# Altium PCB Tachometer-BoardV2.PcbDoc
Units mil, origin at the board's own origin, x right, y up, seen from the top; angles counter-clockwise.
Board outline 3000 x 3540 mil, 2 copper layers (Top Layer, Bottom Layer); 35 components, 29 nets, 152 pads, 22 vias.
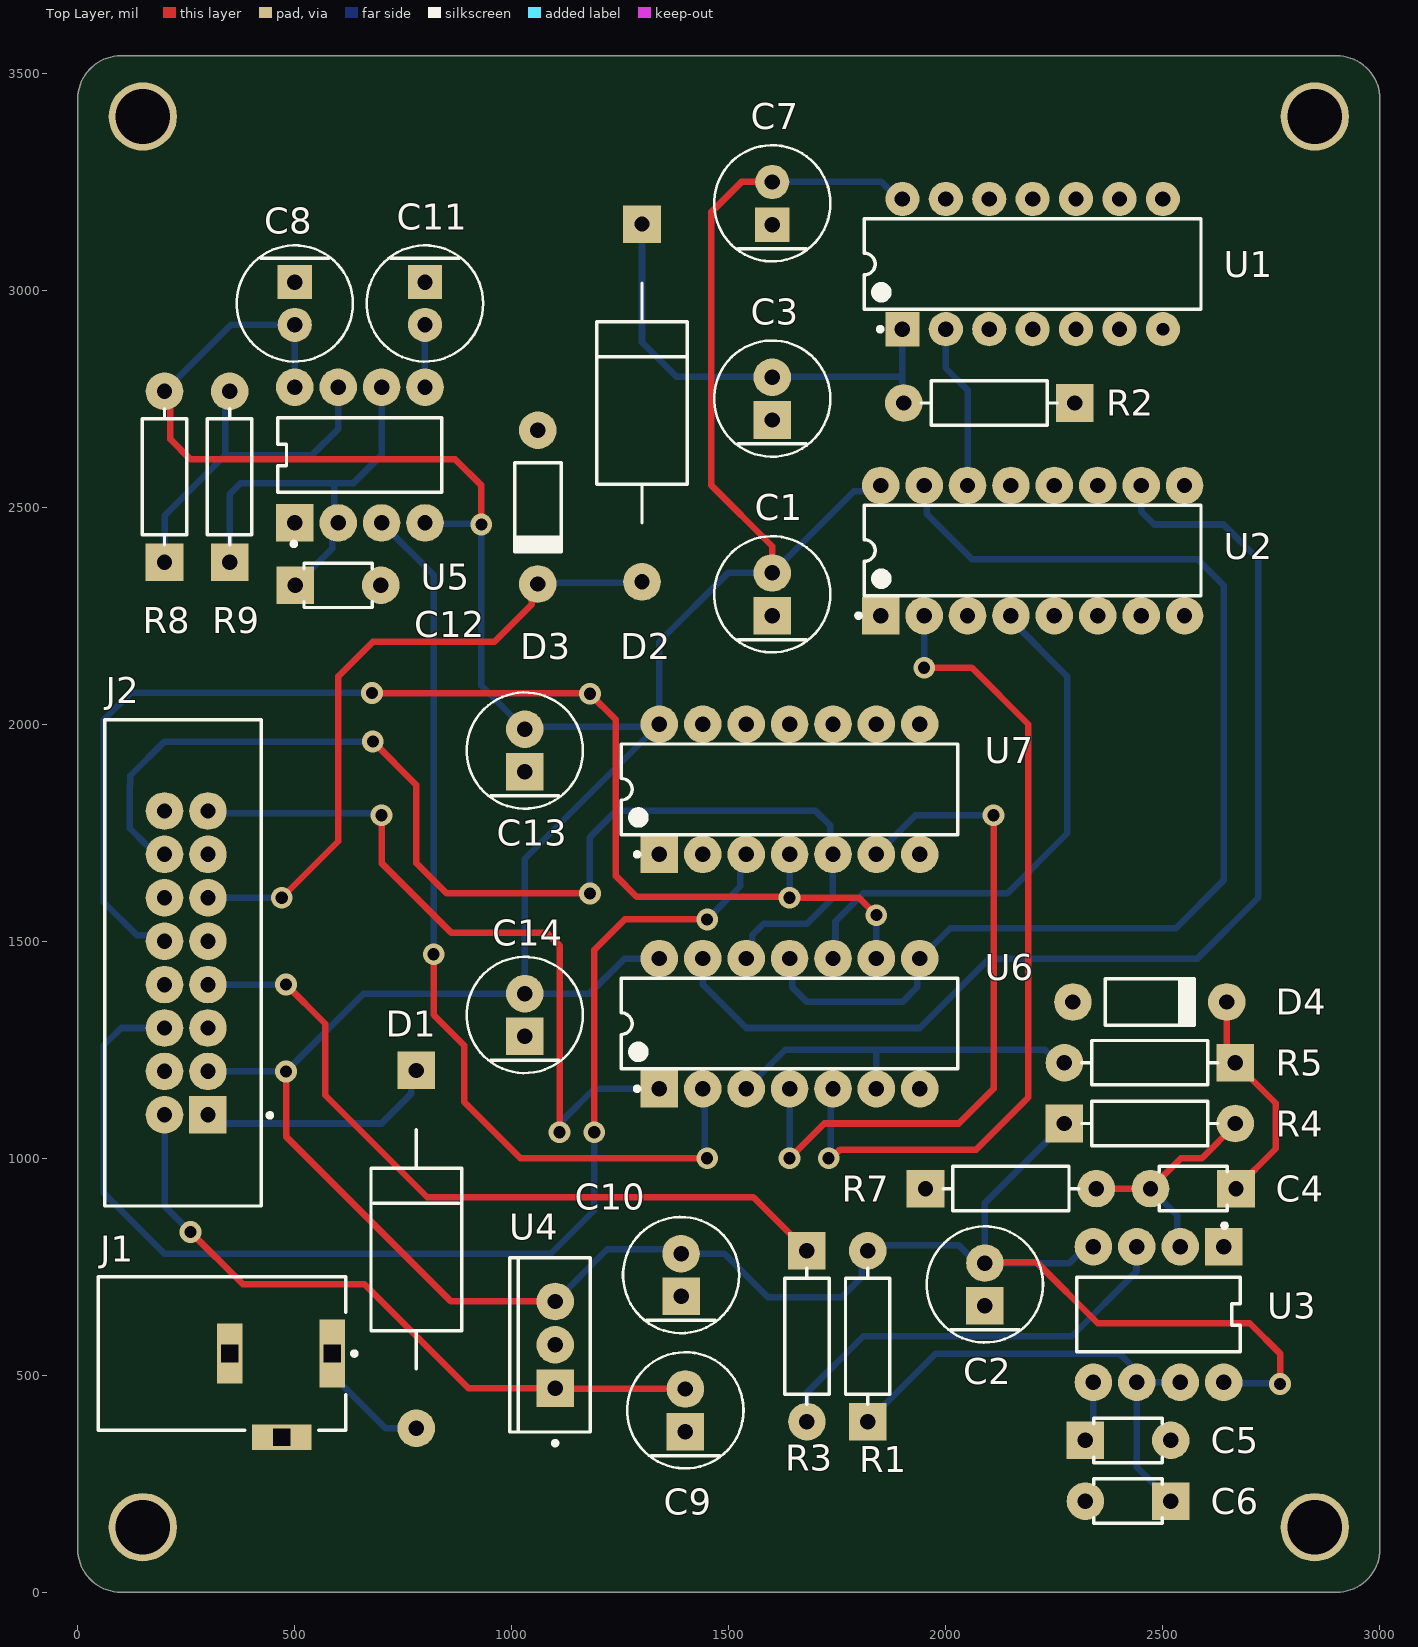
[diagram p0: Top Layer view]
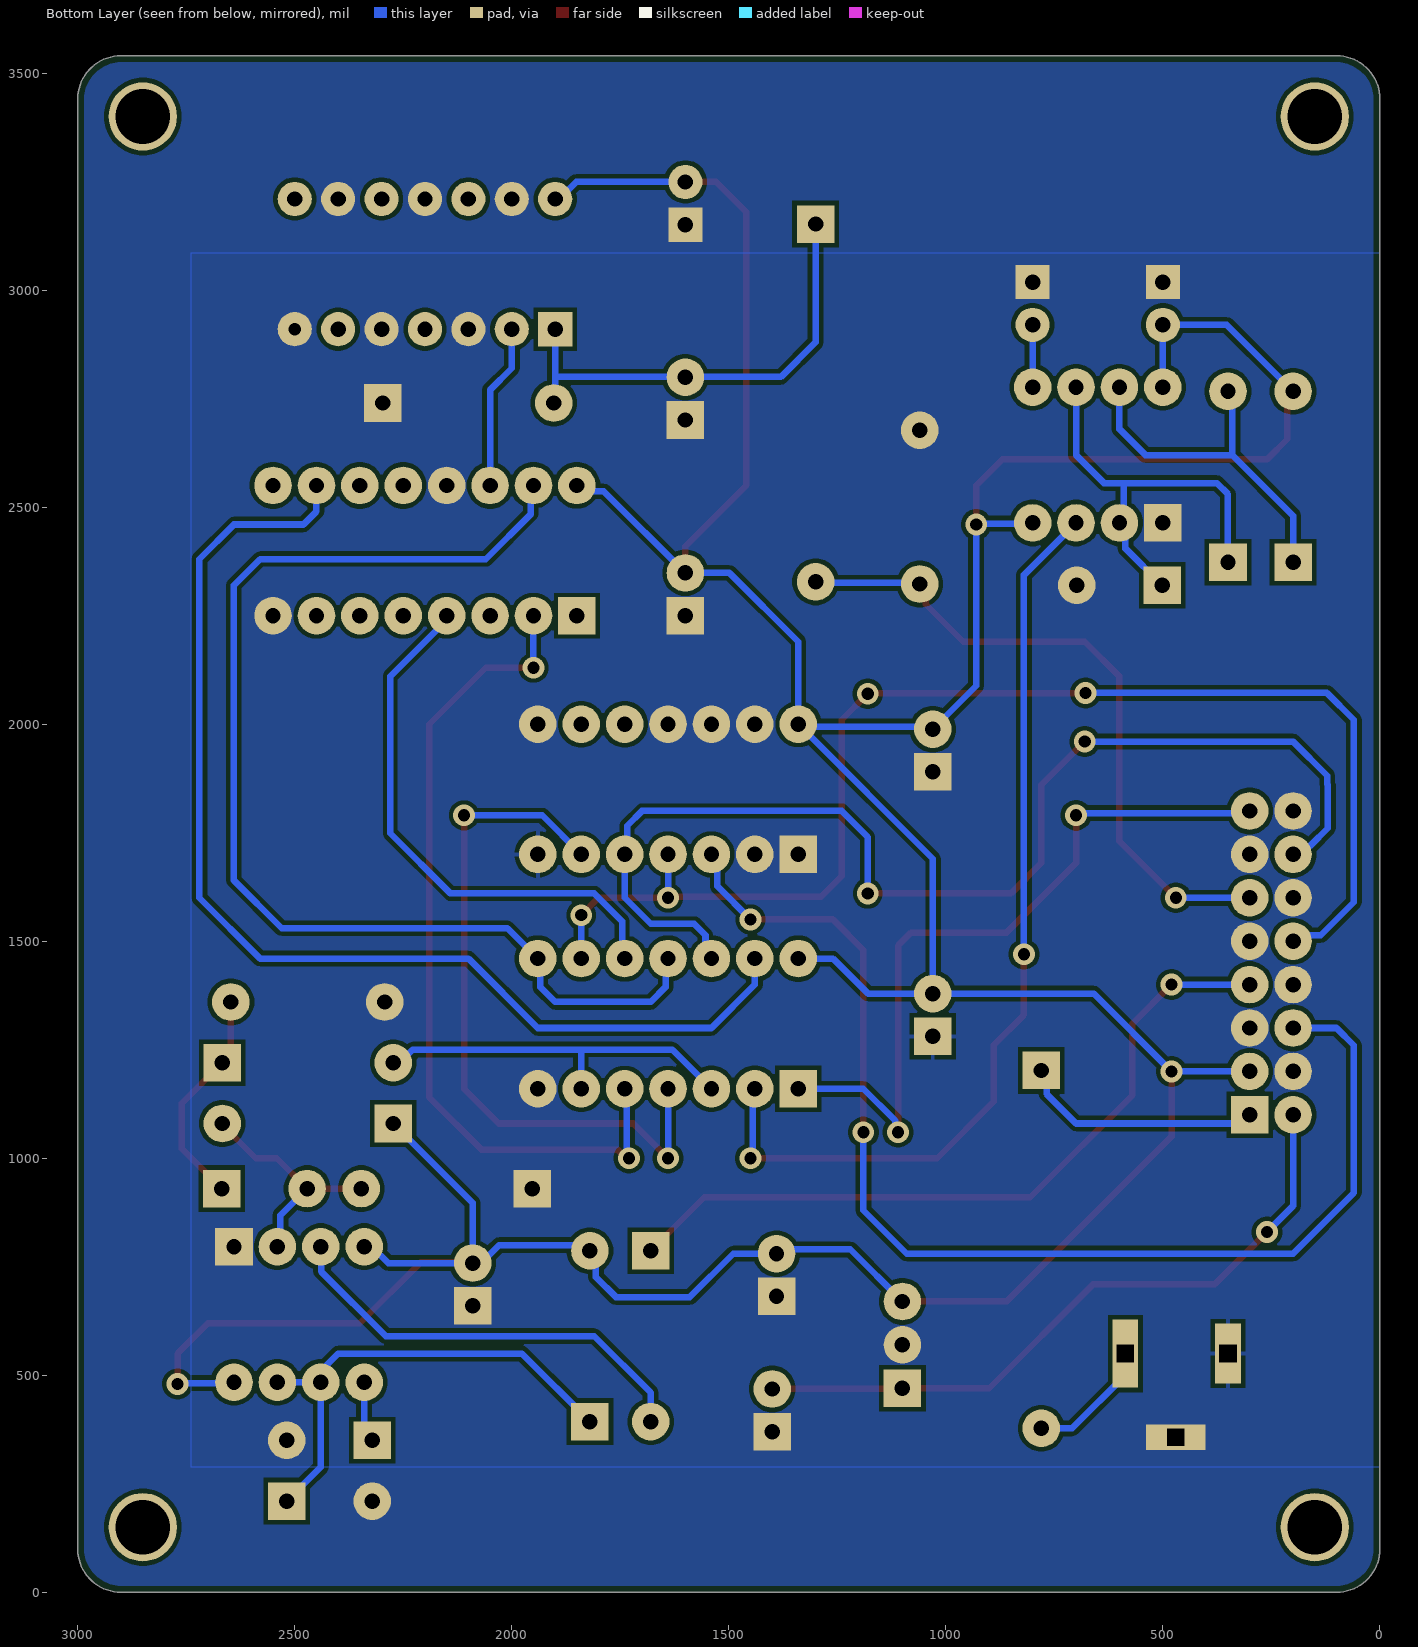
[diagram p1: Bottom Layer view, seen from below]
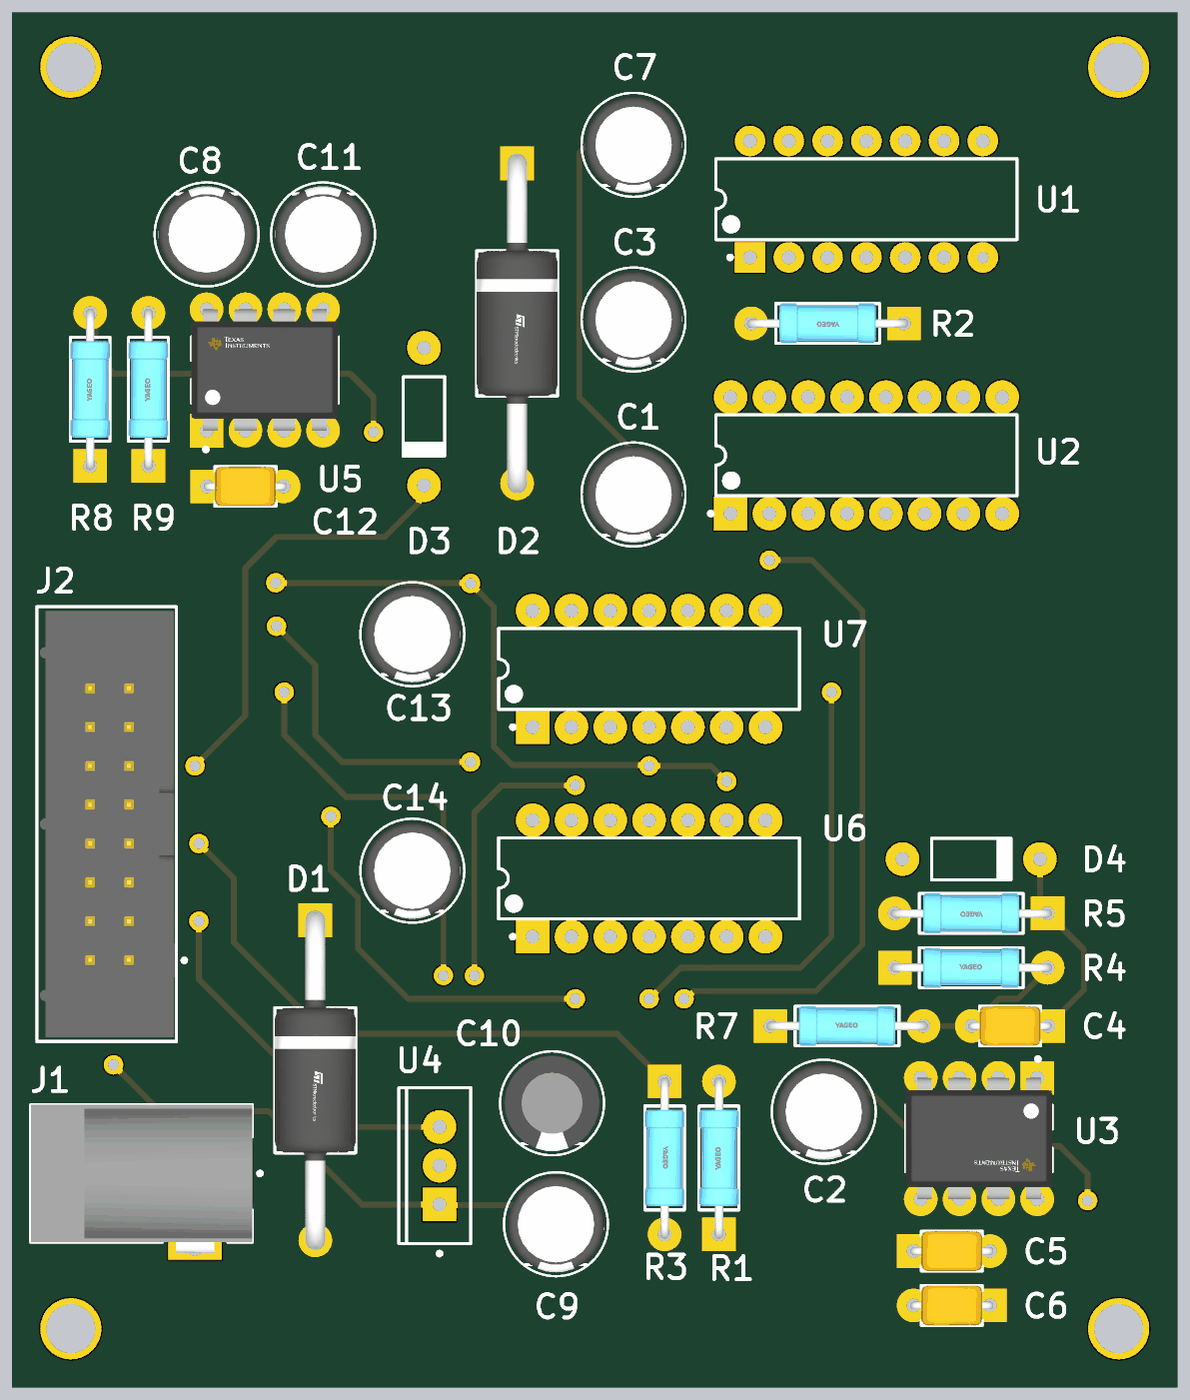
[diagram p2: 3D render of the assembled board from above, using the file's embedded part models]

## Layer stack, top to bottom
Top Solder: solder mask 0.4, Solder Resist, Dk 3.5
Top Layer: signal copper 1.4
Dielectric 1: dielectric 12.6, FR-4, Dk 4.8
Bottom Layer: signal copper 1.4
Bottom Solder: solder mask 0.4, Solder Resist, Dk 3.5

## Board outline
100,0 cw(c100,100) 0,100 0,3440 cw(c100,3440) 100,3540 2900,3540 cw(c2900,3440) 3000,3440 3000,100 cw(c2900,100) 2900,0

## Design rules (kind name [scope] priority, off if disabled: settings)
BoardOutlineClearance [All] p1: gap=15 ignorepadtopadclearanceinfootprint=FALSE
Clearance [All] p1: gap=10 ignorepadtopadclearanceinfootprint=FALSE except(0: Arc-Hole Track-Hole SMDPad-Hole THPad-Hole Via-Hole Fill-Hole Poly-Hole Region-Hole Text-Hole)
PolygonConnect [All] p1: connectstyle=Relief reliefconductorwidth=10 reliefentries=4 polygonreliefangle="90 Angle" airgapwidth=10
RoutingVias [All] p1: holewidth=28 width=50 viastyle="Through Hole" minholewidth=28 minwidth=50 maxholewidth=28 maxwidth=50
SolderMaskExpansion [All] p1: expansion=4 istentingtop=FALSE
Width [All] p1: maxlimit=20 minlimit=12 preferedwidth=15
30 further rules are at their usual default settings.

## Components (designator, comment, footprint, x,y, rotation, side; value= is the part's Value field where it differs from the comment)
C1 "10uF" FP-ESLE3-MFG#1 1600,2299.21 r90 top
C2 "10uF" FP-ESLE3-MFG#1 2090,709.21 r90 top
C3 "0.1uF" FP-ESLE3-MFG#1 1600,2750 r90 top value=10uF
C4 "0.1uF" FP-K15H5-MFG 2570,930 r180 top
C5 "0.1uF" FP-K15H5-MFG 2420,350 r0 top
C6 "0.1uF" FP-K15H5-MFG 2420,210 r180 top
C7 "10uF" FP-ESLE3-MFG#2 1600,3200 r90 top
C8 "10uF" FP-ESLE3-MFG#2 500,2969.21 r270 top
C9 "10uF" FP-ESLE3-MFG#1 1400,419.21 r90 top
C10 "100uF" FP-ZLG6_3X7-MFG 1390,730.79 r90 top
C11 "10uF" FP-ESLE3-MFG#2 800,2969.21 r270 top
C12 "0.1uF" FP-K15H5-MFG 600,2320 r0 top
C13 "10uF" FP-ESLE3-MFG#1 1030,1939.21 r90 top
C14 "10uF" FP-ESLE3-MFG#1 1030,1330 r90 top
D1 "1N4148" FP-DO-201AD-MFG 780,790 r270 top
D2 "1N4148" FP-DO-201AD-MFG 1300,2740 r270 top
D3 "1N4731A" FAIR-DO-41-2_V 1060,2500 r270 top
D4 "1N4731A" FAIR-DO-41-2_V 2470,1360 r0 top
J1 "NEB 21 R" LUMB-NEB21R_V 332.28,550 r270 top
J2 "30316-6002HB" FP-30316-6002HB-MFG 242.5,1450 r90 top
R1 "47K" FP-MFR-25-MFG 1820,590 r90 top value=1.18kΩ
R2 "10K" FP-MFR-25-MFG 2100,2740 r180 top value=1.18kΩ
R3 "100K" FP-MFR-25-MFG 1680,590 r270 top value=1.18kΩ
R4 "1K" FP-MFR-25-MFG 2470,1080 r0 top value=1.18kΩ
R5 "1K" FP-MFR-25-MFG 2470,1220 r180 top value=1.18kΩ
R7 "4.7K" FP-MFR-25-MFG 2150,930 r0 top value=1.18kΩ
R8 "120K" FP-MFR-25-MFG 200,2570 r90 top value=1.18kΩ
R9 "180K" FP-MFR-25-MFG 350,2570 r90 top value=1.18kΩ
U1 "SN7414N" N0014A#1 2200,3060 r90 top
U2 "CD4017BE" N0016A 2200,2400 r90 top
U3 "LM555CN/NOPB" FP-P0008A-MFG 2490,640 r270 top
U4 "LM7805CT" FAIR-TO-220-3 1100,570 r180 top
U5 "LM555CN/NOPB" FP-P0008A-MFG 650,2620 r90 top
U6 "SN74HC08N" N0014A#2 1640,1310 r90 top
U7 "CD74HC4075E" N0014A#2 1640,1850 r90 top

## Footprints (in the part's own frame and the unit in brackets; to place one, negate y for a bottom-side part, rotate by r counter-clockwise, add the part's x,y. Pads: shape width x height; smd on the part's side, far side on the other; paste and mask are expansions set on the pad)
FAIR-DO-41-2_V [mm] "2-Leads, Axial leaded, Body 2.72x5.2mm, Pin Spacing 9mm"
  round 2.2 hole 0.9: 1(-4.5,0) 2(4.5,0)
  silkscreen extent -2.6,-1.36 2.6,1.36, body extent -4.93,-1.36 4.93,1.36, height 2.71
FAIR-TO-220-3 [mm] "FM, 3-Leads, Body 10.2x4.7mm, Pitch 2.54mm"
  rect 2.2x2.2 hole 0.9: 1(0,2.54)
  round 2.2 hole 0.9: 2(0,0) 3(0,-2.54)
  silkscreen extent -2.04,-5.1 2.66,5.87, body extent -2.04,-5.1 2.66,5.1, height 18.95
FP-30316-6002HB-MFG [mm]
  rect 2.2x2.2 hole 0.9 paste-1000 mask+0: 1(-8.89,-1.461)
  round 2.2 hole 0.9 paste-1000 mask+0: 2(-8.89,1.079) 3(-6.35,-1.461) 4(-6.35,1.079) 5(-3.81,-1.461) 6(-3.81,1.079) 7(-1.27,-1.46) 8(-1.27,1.079) 9(1.27,-1.46) 10(1.27,1.079) 11(3.81,-1.46) 12(3.81,1.08) 13(6.35,-1.46) 14(6.35,1.08) 15(8.89,-1.46) 16(8.89,1.08)
  silkscreen extent -14.22,-5.21 14.22,4.57, body extent -14.32,-4.67 14.32,4.67, height 0.25
FP-DO-201AD-MFG [mm]
  rect 2.2x2.2 hole 0.9 paste-1000 mask+0: 1(-10.47,0)
  round 2.2 hole 0.9 paste-1000 mask+0: 2(10.47,0)
  silkscreen extent -7,-2.65 7,2.65, body extent -11.67,-2.75 11.67,2.75, height 0.25
FP-ESLE3-MFG#1 [mm]
  rect 2.2x2.2 hole 0.9 paste-1000 mask+0: 1(-1.25,0)
  round 2.2 hole 0.9 paste-1000 mask+0: 2(1.25,0)
  silkscreen extent -3.4,-3.4 3.4,3.4, body extent -3.5,-3.5 3.5,3.5, height 0.25
FP-ESLE3-MFG#2 [mm]
  rect 2x2 hole 0.9 paste-1000 mask+0: 1(-1.25,0)
  round 2 hole 0.9 paste-1000 mask+0: 2(1.25,0)
  silkscreen extent -3.4,-3.4 3.4,3.4, body extent -3.5,-3.5 3.5,3.5, height 0.25
FP-K15H5-MFG [mm]
  rect 2.2x2.2 hole 0.9 paste-1000 mask+0: 1(-2.5,0)
  round 2.2 hole 0.9 paste-1000 mask+0: 2(2.5,0)
  silkscreen extent -2,-1.3 2,1.3, body extent -3.2,-1.4 3.2,1.4, height 0.25
FP-MFR-25-MFG [mm]
  rect 2.2x2.2 hole 0.9 paste-1000 mask+0: 1(-5,0)
  round 2.2 hole 0.9 paste-1000 mask+0: 2(5,0)
  silkscreen extent -3.98,-1.3 3.98,1.3, body extent -5.72,-1.4 5.72,1.4, height 0.25
FP-P0008A-MFG [mm]
  rect 2.2x2.2 hole 0.9 paste-1000 mask+0: 1(-3.97,3.81)
  round 2.2 hole 0.9 paste-1000 mask+0: 2(-3.97,1.27) 3(-3.97,-1.27) 4(-3.97,-3.81) 5(3.97,-3.81) 6(3.97,-1.27) 7(3.97,1.27) 8(3.97,3.81)
  silkscreen extent -5.32,-4.79 2.17,4.79, body extent -4.69,-5.18 4.69,5.18, height 0.25
FP-ZLG6_3X7-MFG [mm]
  rect 2.2x2.2 hole 0.9 paste-1000 mask+0: 1(-1.25,0)
  round 2.2 hole 0.9 paste-1000 mask+0: 2(1.25,0)
  silkscreen extent -3.4,-3.4 3.4,3.4, body extent -3.5,-3.5 3.5,3.5, height 0.25
LUMB-NEB21R_V [mm] "THD, 3-Leads, Body 14.5x9mm"
  rect 4x1.5 hole 1 square: 1(0,6.45)
  rect 1.5x3.5 hole 1 square: 2(4.9,3.5)
  rect 3.5x1.5 hole 1 square: 3(0,0.45)
  silkscreen extent -4.5,-7.25 4.5,7.88, body extent -4.5,-7.25 5.2,7.25, height 11
N0014A#1 [mm] "DIP, 14-Leads, Body 19.7x6.6mm, Pitch 2.54mm"
  rect 2x2 hole 0.9: 1(-3.81,7.62)
  round 2 hole 0.9: 2(-3.81,5.08) 3(-3.81,2.54) 4(-3.81,0) 5(-3.81,-2.54) 6(-3.81,-5.08) 8(3.81,-7.62) 9(3.81,-5.08) 10(3.81,-2.54) 11(3.81,0) 12(3.81,2.54) 13(3.81,5.08) 14(3.81,7.62)
  round 2 hole 0.75: 7(-3.81,-7.62)
  silkscreen extent -3.93,-9.85 2.65,9.85, body extent -3.95,-9.85 3.95,9.85, height 5.08
N0014A#2 [mm] "DIP, 14-Leads, Body 19.7x6.6mm, Pitch 2.54mm"
  rect 2.2x2.2 hole 0.9: 1(-3.81,7.62)
  round 2.2 hole 0.9: 2(-3.81,5.08) 3(-3.81,2.54) 4(-3.81,0) 5(-3.81,-2.54) 6(-3.81,-5.08) 7(-3.81,-7.62) 8(3.81,-7.62) 9(3.81,-5.08) 10(3.81,-2.54) 11(3.81,0) 12(3.81,2.54) 13(3.81,5.08) 14(3.81,7.62)
  silkscreen extent -3.93,-9.85 2.65,9.85, body extent -3.95,-9.85 3.95,9.85, height 5.08
N0016A [mm] "DIP, 16-Leads, Body 19.7x6.6mm, Pitch 2.54mm"
  rect 2.2x2.2 hole 0.9: 1(-3.81,8.89)
  round 2.2 hole 0.9: 2(-3.81,6.35) 3(-3.81,3.81) 4(-3.81,1.27) 5(-3.81,-1.27) 6(-3.81,-3.81) 7(-3.81,-6.35) 8(-3.81,-8.89) 9(3.81,-8.89) 10(3.81,-6.35) 11(3.81,-3.81) 12(3.81,-1.27) 13(3.81,1.27) 14(3.81,3.81) 15(3.81,6.35) 16(3.81,8.89)
  silkscreen extent -3.93,-9.85 2.65,10.31, body extent -3.95,-9.85 3.95,9.85, height 5.08

## Part data
C1 C2 C7 C8 C9 C11 C13 C14: library part CMP-03015-000004-1, "CAP ALUM 10UF 20% 100V THRU HOLE", Leakage Current=10uA, Manufacturer=kemet, Manufacturer Part Number=ESL106M100AE3AA, Package=ESLE3, Ripple Current=280mA, Temperature="-40°C to +105°C", Temperature Range High=+105°C, Temperature Range Low=-40°C, Tolerance=20%, Voltage Rating=100V, Automotive=No, Capacitance=10uF, Category=Cap, ComponentLink2Description=Datasheet, ComponentLink2URL=https://content.kemet.com/datasheets/KEM_A4074_ESL.pdf, Device Class L1="Passive Components", Device Class L2=Capacitors, Device Class L3="Aluminum Electrolytic Capacitors", Digikey Description="CAP ALUM 10UF 20% 100V THRU HOLE", Dissipation Factor=9%, Esr=0.68Ω, Height=12.5mm, Lead Free=Yes, Life=10000Hours, Material=Aluminum, Mouser Description="Cap, 10UF, 100V, Alu Elec, Radial", Octopart=https://octopart.com/esl106m100ae3aa-kemet-84758885, RoHS=TRUE
C3: library part CMP-03015-000004-1, "CAP ALUM 10UF 20% 100V THRU HOLE", Capacitance=10uF, Leakage Current=10uA, Manufacturer=kemet, Manufacturer Part Number=ESL106M100AE3AA, Package=ESLE3, Ripple Current=280mA, Temperature="-40°C to +105°C", Temperature Range High=+105°C, Temperature Range Low=-40°C, Tolerance=20%, Voltage Rating=100V, Automotive=No, Category=Cap, ComponentLink2Description=Datasheet, ComponentLink2URL=https://content.kemet.com/datasheets/KEM_A4074_ESL.pdf, Device Class L1="Passive Components", Device Class L2=Capacitors, Device Class L3="Aluminum Electrolytic Capacitors", Digikey Description="CAP ALUM 10UF 20% 100V THRU HOLE", Dissipation Factor=9%, Esr=0.68Ω, Height=12.5mm, Lead Free=Yes, Life=10000Hours, Material=Aluminum, Mouser Description="Cap, 10UF, 100V, Alu Elec, Radial", Octopart=https://octopart.com/esl106m100ae3aa-kemet-84758885, RoHS=TRUE
C4 C5 C6 C12: library part CMP-02417-000048-1, "CAP CER 0.1UF 50V X7R RADIAL", Capacitance=100nF, Case/Package=Dipped, Dielectric=X7R, Max Operating Temperature=125°C, Min Operating Temperature=-55°C, Package Quantity=5000, Tolerance=10%, Voltage=50V, Construction=RADIAL, Depth=2.5mm, Diameter=500um, Height=4mm, Height - Seated (Max)=0.1inch, Lead Diameter=0.5mm, Lead Length=30mm, Lead Pitch=5mm, Lead/Base Style="Formed Leads", Length=4mm, Mount="Through Hole", Packaging=Bulk, Radiation Hardening=No, RoHS Compliant=Yes, Series=K, Termination=Radial, Thickness=2.6mm, Voltage Rating=50V, Voltage Rating (DC)=50V, Weight=0.005644oz, Width=2.5mm
C10: library part CMP-35376-000006-1, "CAP ALUM 100UF 20% 10V RADIAL", Leakage Current=30uA, Manufacturer=Rubycon, Manufacturer Part Number=10ZLG100MEFC6.3X7, Package=ZLG6.3X7, Ripple Current=480mA, Temperature="-40°C to +105°C", Temperature Range High=+105°C, Temperature Range Low=-40°C, Tolerance=20%, Voltage Rating=10V, Automotive=No, Capacitance=100uF, Category=Cap, ComponentLink2Description=Datasheet, ComponentLink2URL=http://www.rubycon.co.jp/en/catalog/e_pdfs/aluminum/e_zlg.pdf, Device Class L1="Passive Components", Device Class L2=Capacitors, Device Class L3="Aluminum Electrolytic Capacitors", Digikey Description="CAP ALUM 100UF 20% 10V RADIAL", Dissipation Factor=19%, Height=8mm, Lead Free=Yes, Life=1000Hours, Material=Aluminum, Octopart=https://octopart.com/10zlg100mefc6.3x7-rubycon-19991480, RoHS=TRUE
D1 D2: library part CMP-12187-000025-1, "DIODE SCHOTTKY 40V 3A DO201AD", Forward Current=3A, Manufacturer=STMicroelectronics, Manufacturer Part Number=1N5822, Max Junction Temp=+150°C, Max Repetitive Reverse Voltage=40V, Max Surge Forward Current=80A, Package=DO-201AD, Peak Reverse Current=2mA, Temperature="to +150°C", Automotive=No, Category=Diode, ComponentLink2Description=Datasheet, ComponentLink2URL=https://www.st.com/resource/en/datasheet/1n5822.pdf, Device Class L1="Discrete Semiconductors", Device Class L2=Diodes, Device Class L3="Schottky Diodes", Digikey Description="DIODE SCHOTTKY 40V 3A DO201AD", Height=5.3mm, Lead Free=Yes, Mouser Description="Schottky Diodes & Rectifiers Vr/40V Io/3A BULK", Octopart=https://octopart.com/1n5822-stmicroelectronics-323225, RoHS=TRUE, Temperature Range High=+150°C
D3 D4: library part CMP-0892-00031-1, "Zener Diode, 4.3V, 1W, 5%, -65 to 200 degC, 2-Pin DO-41, Body 2.72 x 5.2 mm, RoHS", Manufacturer="Fairchild Semiconductor", Operating and Storage Temperature Range="-65 to 200 degC", Test Current IZ (mA)=58, Tolerance=5%, ComponentLink1Description="Manufacturer URL", ComponentLink1URL=http://www.fairchildsemi.com/, ComponentLink2Description=Datasheet, ComponentLink2URL=http://www.fairchildsemi.com/ds/1N/1N4744A.pdf, ComponentLink3Description="Package Specification", ComponentLink3URL=http://www.fairchildsemi.com/dwg/DO/DO41A.pdf, DatasheetVersion="Rev. H3", IR (uA)=10, Mounting Technology="Through Hole", PackageDescription="2-Pin Axial leaded, Body 2.72 x 5.2 mm, Lead Spread 25.4 mm", PackageReference=DO-41-2, PackageVersion="Rev. 2", PartNumber=1N4731A, PD (W)=1, RoHS=TRUE, VZ (Max.) (V)=4.515, VZ (Min.) (V)=4.085, ZZ (Max) (ohm)=9
J1: library part CMP-2000-06841-1, "Jack Socket, Body 14.5 x 9 mm, Height 11 mm, -20 to 70 degC, 3-Pin THD, RoHS, Bulk", Current Rating=3A, Manufacturer=Lumberg, Maximum Operating Temperature=+70°C, Minimum Operating Temperature=-20°C, Package Description="3-Pin Through Hole Device, Body 14.5 x 9 mm, Height 11 mm", Package Reference=NEB21R, Voltage Rating=12Vdc, Body Orientation=RightAngle, Datasheet URL=https://datasheet.ciiva.com/11720/0900766b805694d6-11720273.pdf, Datasheet Version=12/2004, Manufacturer URL=http://www.lumberg.com/, Mounting Technology=ThroughHole, Mounting Type=ThroughHole, Plug/Socket=Socket, Termination Method=Solder
J2: library part CMP-05379-000007-1, "CONN HEADER VERT 16POS 2.54MM", Current Rating=1A, Manufacturer=3M, Temperature="-55°C to +105°C", Temperature Range High=+105°C, Temperature Range Low=-55°C, Automotive=No, Category=Conn, ComponentLink2Description=Datasheet, ComponentLink2URL=https://multimedia.3m.com/mws/media/22504O/3mtm-100-in-loprof-hdr-100x-100strt-ra-4-wall-ts0818.pdf, Conn Gender=Male, Conn Orientation=Straight, Contact Material=Gold,Nickel, Device Class L1=Connectors, Device Class L2="Headers and Wire Housings", Device Class L3=unset, Digikey Description="CONN HEADER VERT 16POS 2.54MM", Height=0.375inch, Lead Free=Yes, Manufacturer Part Number=30316-6002HB, Mouser Description="Conn Shrouded Header (4 Sides) HDR 16 POS 2.54mm Solder ST Thru-Hole Box", Number Of Contacts=16, Number Of Rows=2, Octopart=https://octopart.com/30316-6002hb-3m-653367, Package=30316-6002HB, Pitch=2.54mm, RoHS=TRUE, Standoff Height=0.01inch
R1 R2 R3 R4 R5 R7 R8 R9: library part CMP-03413-000001-1, "RES 1.18K OHM 1/4W 1% AXIAL", Manufacturer=Yageo, Manufacturer Part Number=MFR-25FBF52-1K18, Package=MFR-25, Power Rating=0.25W, Resistance=1.18kΩ, Temperature="-55°C to +155°C", Temperature Coefficient=100ppm/°C, Temperature Range High=+155°C, Temperature Range Low=-55°C, Tolerance=1%, Voltage Rating=250V, Automotive=No, Category=Res, ComponentLink2Description=Datasheet, ComponentLink2URL=https://www.yageo.com/upload/media/product/products/datasheet/lr/Yageo_LR_MFR_1.pdf, Composition="Metal Film", Device Class L1="Passive Components", Device Class L2=Resistors, Device Class L3="Through-Hole Resistors", Digikey Description="RES 1.18K OHM 1/4W 1% AXIAL", Height=2.6mm, Ipc Land Pattern Name=RESAD1000W75L680D260, Lead Free=Yes, Mouser Description="Metal Film Resistors 1.18K OHM 1/4W 1%", Octopart=https://octopart.com/mfr-25fbf52-1k18-yageo-56251681, RoHS=TRUE, Series=MFR
U1: library part CMP-1615-00881-3, "Hex schmitt-trigger inverters, N0014A, TUBE", F @ Nom Voltage(Max)(Mhz)=35, Generic Part Number=SN7414, ICC @ Nom Voltage(Max)(mA)=0.06, Manufacturer="Texas Instruments", Operating Temperature Range(C)="0 to 70", Rating=Catalog, tpd @ Nom Voltage(Max)(ns)=22, Voltage(Nom)(V)=5, Bits(#)=6, Code_JEDEC=MS-001, DatasheetVersion=SDLS049B, Input Type=TTL, Output Drive (IOL/IOH)(Max)(mA)=-0.8/16, Output Type=CMOS, PackageReference=N0014A, Schmitt Trigger=Yes, Technology Family=TTL, VCC(Max)(V)=5.25, VCC(Min)(V)=4.75
U2: library part CMP-1623-00541-2, "CMOS Decade Counter with 10 Decoded Outputs, N0016A, TUBE", F @ Nom Voltage(Max)(Mhz)=8, Generic Part Number=CD4017B, ICC @ Nom Voltage(Max)(mA)=0.03, Manufacturer="Texas Instruments", Operating Temperature Range(C)="-55 to 125", Rating=Military, tpd @ Nom Voltage(Max)(ns)=270, Voltage(Nom)(V)=10, Bits(#)=10, Code_JEDEC=MS-001, DatasheetVersion=SCHS027C, Function=Counter, Input Type=CMOS, Inputs=1, Output Drive (IOL/IOH)(Max)(mA)=1.5/-1.5, Output Type=CMOS, PackageReference=N0016A, Schmitt Trigger=No, Technology Family=CD4000, Type=Decade, VCC(Max)(V)=18, VCC(Min)(V)=3
U3 U5: library part CMP-0056-00016-4, "IC OSC SINGLE TIMER 100KHZ 8-DIP", Ambient Temperature Range High=+70°C, Ambient Temperature Range Low=0°C, Manufacturer="Texas Instruments", Max Supply Voltage=16V, Min Supply Voltage=4.5V, Nominal Supply Current=3mA, Package=P0008A, Temperature="0°C to +70°C", Automotive=No, Category=IC, ComponentLink2Description=Datasheet, ComponentLink2URL=http://www.ti.com/lit/ds/symlink/lm555.pdf, Device Class L1="Integrated Circuits (ICs)", Device Class L2="Clock and Timing", Device Class L3="Timers and Oscillators", Digikey Description="IC OSC SINGLE TIMER 100KHZ 8-DIP", Height=5.08mm, Lead Free=Yes, Manufacturer Part Number=LM555CN/NOPB, Max Junction Temp=+70°C, Number Of Timers/Counters=1, Octopart=https://octopart.com/lm555cn%2Fnopb-texas+instruments-24814897, RoHS=TRUE, Standoff Height=0.51mm, Temperature Range High=+70°C, Temperature Range Low=0°C
U4: library part CMP-2000-04938-1, "Positive Voltage Regulator, 5 V, 1 A, -40 to 125 degC, 3-Pin TO-220, RoHS, Tube", Manufacturer=FairchildSemiconductor, Maximum Input Voltage=35V, Maximum Output Current=2.2(Typ)A, Maximum Quiescent Current=8mA, Operating Temperature=-40to125degC, Output Voltage=5V, Package=3TO-220AB, Package Description="3-Pin Through Hole Device, Body 10 x 4.5 mm, Pitch 2.54 mm", Package Reference=TO-220, Typical Dropout Voltage @ Current=2@1AV, Accuracy=±4%, Category=LinearRegulator, Datasheet URL=https://datasheet.ciiva.com/26904/lm7805ct-26904988.pdf, Datasheet Version=Aug-12, Line Regulation=100mV, Load Regulation=100mV, Manufacturer URL=https://www.fairchildsemi.com/, Mounting=ThroughHole, Number of Outputs=1, Output Type=Fixed, Package URL=https://www.fairchildsemi.com/package-drawings/TO/TO220B03.pdf, Packaging=Rail/Tube, Polarity=Positive, Rad Hard=No, Type=Linear
U6: library part CMP-0777-00250-3, "Quadruple 2-Input Positive-AND Gates, N0014A, TUBE", F @ Nom Voltage(Max)(Mhz)=70, Generic Part Number=SN74HC08, ICC @ Nom Voltage(Max)(mA)=0.02, Manufacturer="Texas Instruments", Operating Temperature Range(C)="-40 to 85", Rating=Catalog, tpd @ Nom Voltage(Max)(ns)=28, Voltage(Nom)(V)=5, Bits(#)=4, DatasheetVersion=SCLS081F, Input Type=CMOS, Output Type=CMOS, PackageReference=N0014A, Schmitt Trigger=No, Technology Family=HC, VCC(Max)(V)=6, VCC(Min)(V)=2
U7: library part CMP-1573-00141-3, "High Speed CMOS Logic Triple 3-Input OR Gates, N0014A, TUBE", F @ Nom Voltage(Max)(Mhz)=70, Generic Part Number=CD74HC4075, ICC @ Nom Voltage(Max)(mA)=0.02, Manufacturer="Texas Instruments", Operating Temperature Range(C)="-55 to 125", Rating=Catalog, tpd @ Nom Voltage(Max)(ns)=25, Voltage(Nom)(V)=5, Bits(#)=3, Code_JEDEC=MS-001, DatasheetVersion=SCHS210G, Input Type=CMOS, Output Drive (IOL/IOH)(Max)(mA)=5.2/-5.2, Output Type=CMOS, PackageReference=N0014A, PackageVersion=http://www.ti.com/lit/ml/mpdi002c/mpdi002c.pdf, VCC(Max)(V)=6, VCC(Min)(V)=2

## Free pads (board coordinates)
  round 157.48 hole 125.98 unplated: 2(150,150) 2(150,3400) 2(2850,150) 2(2850,3400)

## Via types
v1: diameter 50, hole 28, Top Layer to Bottom Layer, 22 vias

## Nets (pads, with @x,y where several pads share a name; then routed paths per layer and width w, separated by ;. In a path a pad name is that pad's centre, name@x,y a point inside that pad or via, vN(x,y) a via of type N, cw(c..) or ccw(c..) an arc to the next point about the centre after c; other vN are vias at no path point)
+5V: C1.2 C2.2 C7.2 C8.2 C10.2 C13.2 C14.2 J2.3 R1.2 R4.1 R8.2 U1.14 U2.16 U3.4 U3.8 U4.3 U5.4 U5.8 U6.14 U7.14 | length 10298.3
  Top Layer w15: R8.2 213.7,2753.15 213.7,2656.3 260,2610 870,2610 930,2550 v1(930,2460) ; v1(480,1200) 480,1050 860,670 U4.3 ; C1.2 1600,2410 1460,2550 1460,3180 1529.21,3249.21 C7.2 ; C2.2 2091.57,760 2210,760 2350,620 2700,620 2770,550 v1(2770,480)
  Bottom Layer w15: R8.2 353.15,2920 C8.2 U5.8 ; J2.3 v1(480,1200) 659.21,1379.21 1000,1379.21 C14.2 ; U5.4 801.85,2461.85 928.15,2461.85 v1(930,2460) 930,2088.43 C13.2 1035.79,1994.21 1324.21,1994.21 1330,2000 U7.14 ; U4.3 1220,790 C10.2@1380,790 ; U6.14 1260,1460 1179.21,1379.21 C14.2 ; C10.2@1374.55,790 C10.2@1380,790 ; C7.2 1851.72,3249.21 1890.93,3210 U1.14 ; U2.16 1836.3,2536.3 1787.87,2536.3 C1.2 1498.43,2348.43 1340,2190 U7.14 ; R4.1 2090,896.85 C2.2 ; U3.4 2322.68,796.3 2284.81,758.43 C2.2 ; U3.8 2641.85,481.85 2768.15,481.85 v1(2770,480) ; C14.2 1030,1690 1329.21,1989.21 U7.14 ; C10.2@1380,790 C10.2 1490,780 1590,680 1760,680 1806.3,726.3 1806.3,773.15 1833.15,800 2029.05,800 2070.62,758.43 C2.2
BOX_ON: C9.2 J2.2 U4.1 | length 1584.6
  Top Layer w15: v1(260,830) 380,710 660,710 900,470 U4.1 1101.57,468.43 C9.2
  Bottom Layer w15: J2.2 200,890 v1(260,830)
CAL_SELECT: J2.15 U6.1 | length 1716
  Top Layer w15: v1(700,1790) 700,1680 860,1520 1080,1520 1110,1490 v1(1110,1060)
  Bottom Layer w15: J2.15 305,1795 695,1795 v1(700,1790) ; v1(1110,1060) 1116.7,1066.7 1116.7,1086.7 1190,1160 U6.1
CALIBRATION: U5.3 U6.2 | length 2190.4
  Top Layer w15: v1(820,1470) 820,1330 890,1260 890,1130 1020,1000 v1(1450,1000)
  Bottom Layer w15: U5.3 820,2343.7 v1(820,1470) ; U6.2 1445,1155 1445,1005 v1(1450,1000)
DIV2_SELECT: J2.10 U6.9 U7.4 | length 3025.8
  Top Layer w15: v1(678.13,2071.87) 679.06,2070.94 1179.06,2070.94 1240,2010 1240,1650 1287.5,1602.5 1637.5,1602.5 v1(1640,1600) 1800,1600 v1(1840,1560)
  Bottom Layer w15: J2.10 186.3,1513.7 136.3,1513.7 60,1590 60,2010 121.87,2071.87 v1(678.13,2071.87) ; v1(1640,1600) U7.4 ; U6.9 v1(1840,1560)
  other v1: 1180,2070
DIV4_SELECT: J2.14 U6.12 U7.5 | length 2741.2
  Top Layer w15: v1(680,1960) 780,1860 780,1680 850,1610 v1(1180,1610)
  Bottom Layer w15: J2.14 180.62,1700 159.09,1721.53 158.47,1721.53 120,1760 120,1860 121.25,1861.25 121.25,1881.25 200,1960 v1(680,1960) ; v1(1180,1610) 1180,1740 1240,1800 1700,1800 1734.19,1765.81 1734.19,1705.81 U7.5 1740,1600 1680,1540 1580,1540 1553.7,1513.7 1553.7,1473.7 U6.12
DIVIDE2: U2.4 U6.10 | length 1261.5
  Bottom Layer w15: U6.10 1745.81,1465.81 1745.81,1545.81 1810,1610 2141.21,1610 2280,1748.79 2280,2110 2150,2240 U2.4
DIVIDE4: U2.10 U6.13 | length 2661.2
  Bottom Layer w15: U6.13 1440,1400 1540,1300 1940,1300 2100,1460 2580,1460 2720,1600 2720,2380 2640,2460 2480,2460 2450,2490 U2.10
ENGINE_INPUT: D2.2 D3.2 J2.11 | length 1543.3
  Top Layer w15: v1(470,1600) 600,1730 600,2110 680,2190 960,2190 1046.3,2276.3 1046.3,2309.13 D3.2
  Bottom Layer w15: J2.11 v1(470,1600) ; D3.2 1062.48,2325.31 1297.52,2325.31 D2.2
ENGINE_SELECT: J2.6 U7.3 | length 2802.3
  Top Layer w15: v1(1190,1060) 1190,1480 1260,1550 v1(1450,1550)
  Bottom Layer w15: J2.6 100,1300 60,1260 60,920 200,780 1090,780 1190,880 v1(1190,1060) ; v1(1450,1550) 1526.3,1626.3 1526.3,1686.3 U7.3
EXT_POT: J2.7 R3.1 | length 1730.4
  Top Layer w15: v1(480,1400) 570,1310 570,1145.36 805.36,910 1556.85,910 R3.1
  Bottom Layer w15: J2.7 v1(480,1400)
FILTERED: U2.2 U6.5 | length 1956
  Top Layer w15: v1(1730,1000) 1736.29,1000 1756.29,1020 2070,1020 2190,1140 2190,2000 2060,2130 v1(1950,2130)
  Bottom Layer w15: v1(1730,1000) 1735,1005 1735,1155 U6.5 ; v1(1950,2130) U2.2
GND: C1.1 C2.1 C3.1 C5.2 C6.2 C7.1 C8.1 C9.1 C10.1 C11.1 C12.2 C13.1 C14.1 D3.1 D4.1 J1.2 J1.3 J2.4 J2.5 J2.8 J2.9 J2.12 J2.13 J2.16 R2.1 R7.1 U1.3 U1.5 U1.7 U1.9 U1.11 U1.13 U2.8 U2.13 U3.1 U4.2 U5.1 U6.7 U7.1 U7.2 U7.7 U7.8 U7.11 U7.12 U7.13
NetC3_2: C3.2 D2.1 R2.2 U1.1 | length 1077.3
  Bottom Layer w15: D2.1 1300,2880 1380,2800 1599.21,2800 C3.2 1600.79,2800 1900,2800 ; U1.1 1900,2800 ; R2.2 1900,2743.15 1900,2800
NetC4_1: C4.1 D4.2 R5.1 | length 514.7
  Top Layer w15: D4.2 2647.17,1239.68 R5.1 2760,1126.85 2760,1021.57 C4.1
NetC4_2: C4.2 R4.2 R7.2 U3.2 | length 546
  Top Layer w15: R7.2 C4.2 2541.57,1000 2590,1000 2666.85,1076.85 R4.2
  Bottom Layer w15: C4.2 2533.34,868.24 2533.34,802.96 U3.2
NetC5_1: C5.1 U3.5 | length 141.3
  Bottom Layer w15: C5.1 2340,368.43 U3.5
NetC6_1: C6.1 R1.1 U3.6 U3.7 | length 1134
  Bottom Layer w15: R1.1 1976.85,550 2400,550 2426.3,523.7 2426.3,497.4 U3.6 ; C6.1 2440,288.43 U3.6 ; U3.7 U3.6
NetC11_2: C11.2 U5.5 | length 134.5
  Bottom Layer w15: U5.5 C11.2@800,2910.79
NetD1_2: D1.2 J1.1 | length 293.9
  Bottom Layer w15: J1.1 586.22,500.79 709.21,377.8 D1.2
NetM1_2: 
NetR3_2: R3.2 U3.3 | length 999.1
  Bottom Layer w15: R3.2 1680,460 1810,590 2290,590 2439.28,739.28 2439.28,795.58 U3.3
NetR8_1: R8.1 R9.2 U5.7 | length 837
  Bottom Layer w15: R8.1 200,2480 340,2620 ; R9.2 340,2756.85 340,2620 ; U5.7 600,2680 540,2620 340,2620
NetU6_4: U6.4 U7.6 | length 1633.6
  Top Layer w15: v1(1640,1000) 1720,1080 2030,1080 2110,1160 v1(2110,1790)
  Bottom Layer w15: v1(1640,1000) U6.4 ; U7.6 1930,1790 v1(2110,1790)
RESET: U2.15 U6.8 U6.11 | length 2728.1
  Bottom Layer w15: U6.11 1645.81,1454.19 1645.81,1394.19 1680,1360 1900,1360 1934.19,1394.19 1934.19,1454.19 2010,1530 2530,1530 2640,1640 2640,2320 2580,2380 2060,2380 1955.81,2484.19 1955.81,2544.19 U2.15
SCHMITT: U1.2 U2.14 | length 380.7
  Bottom Layer w15: U1.2 2000,2820 2050,2770 U2.14
TACH_INPUT: R5.2 U6.3 U6.6 | length 872.9
  Bottom Layer w15: U6.3 1630,1250 1840,1250 ; U6.6 1840,1250 ; R5.2 2258.56,1220 2228.56,1250 1840,1250
TRIGGER: C12.1 R9.1 U5.2 U5.6 | length 982.6
  Bottom Layer w15: R9.1 350,2530 375.61,2555.61 586.1,2555.61 ; C12.1 586.3,2404.72 586.3,2450 U5.2 590.49,2473.21 590.49,2551.21 586.1,2555.61 ; U5.6 700,2620 635.61,2555.61 586.1,2555.61
VCC: D1.1 J2.1 | length 574.1
  Bottom Layer w15: J2.1 320,1080 700,1080 767.99,1147.99 767.99,1172.4 D1.1@800,1204.41
pads on no net: U1.4 U1.6 U1.8 U1.10 U1.12 U2.1 U2.3 U2.5 U2.6 U2.7 U2.9 U2.11 U2.12 U7.9 U7.10

## Polygon pours and split planes (outlines as drawn)
GND on Bottom Layer "GND_L02_P001" (solid, pour order 1): 0,0 0,3600 3000,3600 3000,0
GND on Bottom Layer "NONET_L02_P000" (solid, shelved, pour order 0): 0,3084.65 2740,3084.65 2740,289.37 0,289.37

## Silkscreen, mask and mechanical layers (free items; w line width, h text height)
Mechanical 1:
  the board outline again, w3